# Altium PCB PCB_led.PcbDoc
Units mm, origin at the board's own origin, x right, y up, seen from the top; angles counter-clockwise.
Board outline 30 x 56 mm, 2 copper layers (Top Layer, Bottom Layer); 45 components, 42 nets, 165 pads, 27 vias.
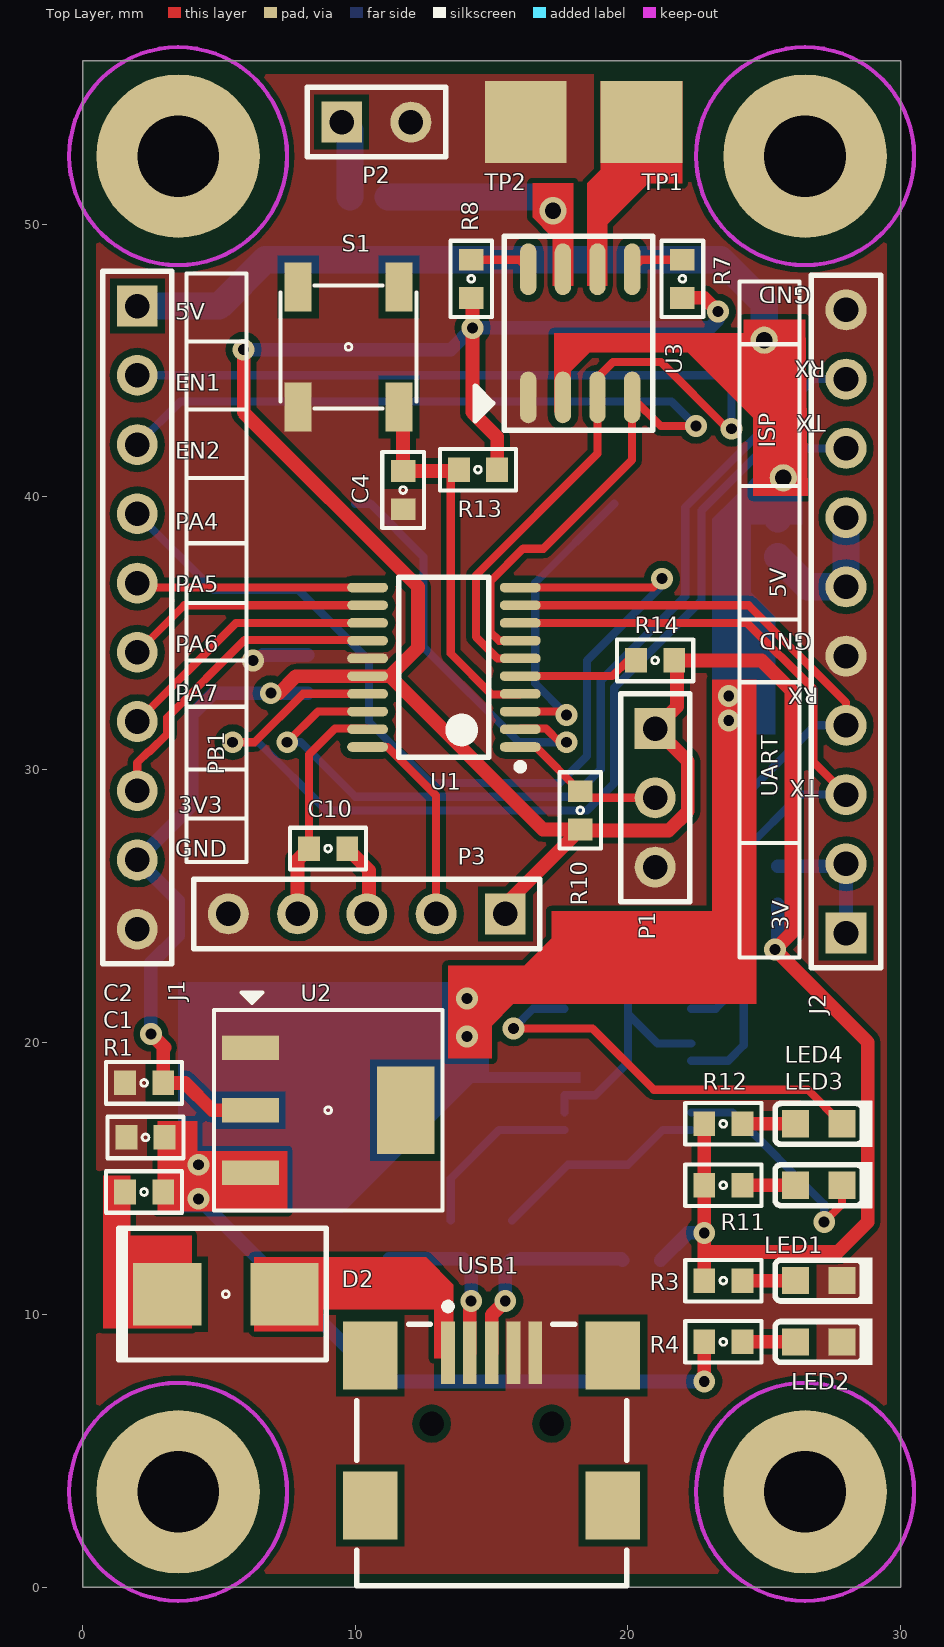
[diagram p0: Top Layer view]
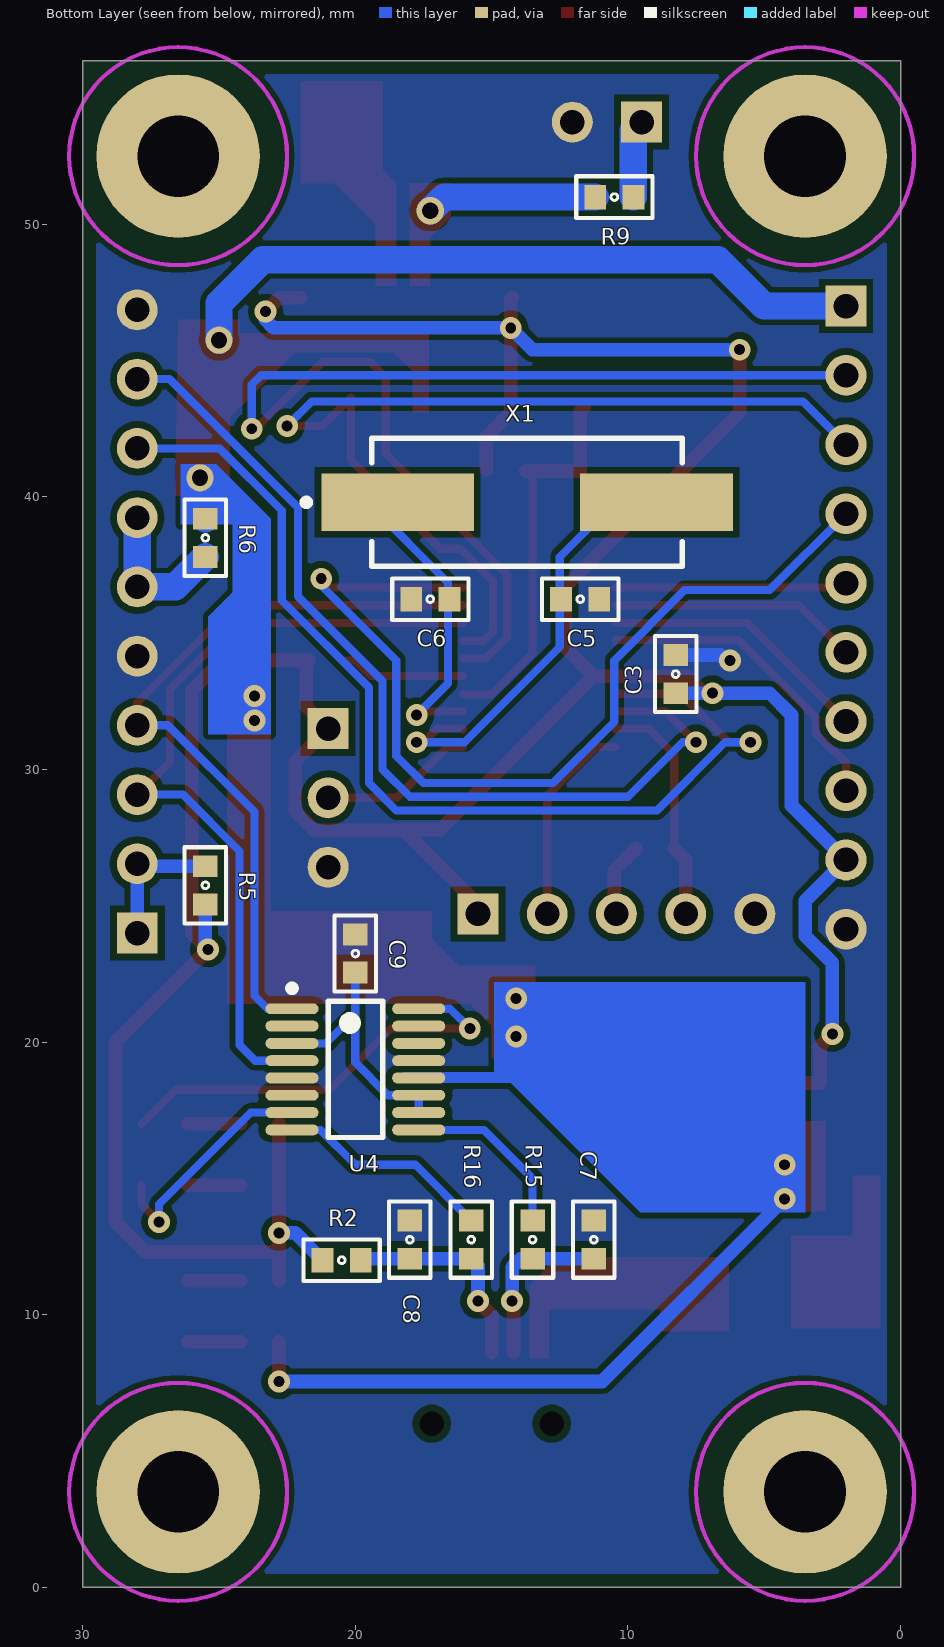
[diagram p1: Bottom Layer view, seen from below]

## Layer stack, top to bottom
Top Solder: solder mask 0.0102, Solder Resist, Dk 3.5
Top Layer: signal copper 0.0356
Dielectric1: dielectric 0.32, FR-4, Dk 4.8
Bottom Layer: signal copper 0.0356
Bottom Solder: solder mask 0.0102, Solder Resist, Dk 3.5

## Board outline
0,0 30,0 30,56 0,56

## Design rules (kind name [scope] priority, off if disabled: settings)
AssemblyTestPointUsage SilkToBoardRegionClearance_2 [All] p2:
AssemblyTestPointUsage SilkToBoardRegionClearance_3 [All] p3:
Clearance [All] p1: gap=0.152
HoleSize [All] p1: absolutevalues=TRUE maxlimit=6.35 minlimit=0.3 maxpercent=80.000 minpercent=20.000
MatchedLengths DiffPair_DIFF100MatchedLengths [InDifferentialPairClass('DIFF100')] p1: tolerance=0.152 checknetsindiffpair=TRUE checkdiffpairvsdiffpair=FALSE checkxsignals=FALSE checkothers=FALSE
MinimumSolderMaskSliver [All] p1: minsoldermaskwidth=0.1
MinimumSolderMaskSliver SilkscreenOverComponentPads_2 [All] p2: minsoldermaskwidth=0.254
MinimumSolderMaskSliver SilkToSolderMaskClearance_1 [IsPad] p3: minsoldermaskwidth=0.254
MinimumSolderMaskSliver SilkscreenOverComponentPads_1 [All] p4: minsoldermaskwidth=0.254
MinimumSolderMaskSliver SilkToSolderMaskClearance [IsPad] p5: minsoldermaskwidth=0.254
MinimumSolderMaskSliver SilkscreenOverComponentPads [All] p6: minsoldermaskwidth=0.254
PolygonConnect [All] p1: connectstyle=Direct reliefconductorwidth=0.254 reliefentries=4 polygonreliefangle="90 Angle" airgapwidth=0.254
RoutingVias [All] p1: holewidth=0.305 width=0.635 viastyle="Through Hole" minholewidth=0.305 minwidth=0.635 maxholewidth=0.711 maxwidth=1.27
SilkToBoardRegionClearance SilkToBoardRegionClearance_1 [All] p2:
SilkToSolderMaskClearance SilkToSolderMaskClearance_2 [IsPad] p1: minsilkscreentomaskgap=0.254 clearancetoexposedcopper=TRUE
SolderMaskExpansion [All] p1: expansion=0.102
Width [All] p1: maxlimit=2.54 minlimit=0.152 preferedwidth=0.254
27 further rules are at their usual default settings.

## Components (designator, comment, footprint, x,y, rotation, side; value= is the part's Value field where it differs from the comment)
C1 "0.1uF" 1608[0603] 2.3,16.5 r0 top
C2 "47uF" 1608[0603] 2.25,18.5 r0 top
C3 "0.1uF" 1608[0603] 8.25,33.5 r270 bottom
C4 "100nf" 1608[0603] 11.75,40.25 r90 top
C5 "20uF" 1608[0603] 11.75,36.25 r180 bottom
C6 "20uF" 1608[0603] 17.25,36.25 r0 bottom
C7 "47pF" 1608[0603] 11.25,12.75 r270 bottom
C8 "47pF" 1608[0603] 18,12.75 r270 bottom
C9 "0.1uF" 1608[0603] 20,23.25 r270 bottom
C10 "1000pF" 1608[0603] 9,27.1 r0 top
D2 "B340LB-13-F" DIOM4336X25N 5.25,10.75 r180 top
J1 "Header 10" HDR1X10 2,47 r270 top
J2 "Header 10" HDR1X10 28,24 r90 top
LED1 "LED2" KING-0603LED_YELLOW_V 27,11.25 r180 top
LED2 "LED2" KING-0603LED_GREEN_V 27,9 r180 top
LED3 "LED2" KING-0603LED_GREEN_V 27,14.75 r180 top
LED4 "LED2" KING-0603LED_ORANGE_V 27,17 r180 top
P1 "Header 3" HDR1X3 21,31.5 r270 top
P2 "Header 2" HDR1X2 9.5,53.75 r0 top
P3 "Header 5" HDR1X5 15.5,24.7 r180 top
R1 "0" 1608[0603] 2.25,14.5 r180 top
R2 "1.5k" 1608[0603] 20.5,12 r180 bottom
R3 "510" 1608[0603] 23.5,11.25 r180 top
R4 "510" 1608[0603] 23.5,9 r180 top
R5 "100" 1608[0603] 25.5,25.75 r90 bottom
R6 "100" 1608[0603] 25.5,38.5 r270 bottom
R7 "22" 1608[0603] 22,48 r90 top
R8 "22" 1608[0603] 14.25,48 r90 top
R9 "1k" 1608[0603] 10.5,51 r180 bottom
R10 "10k" 1608[0603] 18.25,28.5 r270 top
R11 "510" 1608[0603] 23.5,14.75 r180 top
R12 "510" 1608[0603] 23.5,17 r180 top
R13 "10k" 1608[0603] 14.5,41 r180 top
R14 "0" 1608[0603] 21,34 r180 top
R15 "22" 1608[0603] 13.5,12.75 r90 bottom
R16 "22" 1608[0603] 15.75,12.75 r90 bottom
S1 "TSKB-2JL" TSKB-2JL 9.75,45.5 r90 top
TP1 "5V_BATT" PAD1 20.5,53.75 r0 top
TP2 "GND_BATT" PAD1 16.25,53.75 r0 top
U1 "STM32F030F4P6" STM-TSSOP20_L 13.25,33.75 r180 top
U2 "AMS1117-3.3 SOT223" SOT223_L 9,17.5 r0 top
U3 "TI-TPS2066D8" D8_L 18.25,46 r90 top
U4 "FT230XS-U" SSOP-16_L 20,19 r180 bottom
USB1 "USB002" USB/SM0.8-6H5 15,0.75 r270 top
X1 "8MHz" ABRA-ABLS2-2_V 13.7,39.8 r180 bottom

## Footprints (in the part's own frame and the unit in brackets; to place one, negate y for a bottom-side part, rotate by r counter-clockwise, add the part's x,y. Pads: shape width x height; smd on the part's side, far side on the other; paste and mask are expansions set on the pad)
1608[0603] [mm] "Chip Capacitor, Body 1.6x0.8mm, IPC High Density"
  rect 0.8x0.9 smd: 1(-0.7,0) 2(0.7,0)
  silkscreen extent -1.4,-0.76 1.4,0.76, body extent -0.87,-0.48 0.87,0.48, height 1.3
ABRA-ABLS2-2_V [mm] "SMD, 2-Leads, Body 11.4x4.7mm, Height 3.3mm"
  rect 5.6x2.1 smd: 1(-4.75,0) 2(4.75,0)
  silkscreen extent -8.23,-2.35 5.7,2.35, body extent -5.7,-2.35 5.7,2.35, height 3.3
D8_L [mm] "SOIC, 8-Leads, Body 4.9x3.9mm, Pitch 1.27mm, IPC High Density"
  oval 1.9x0.6 smd: 1(-2.35,1.905) 2(-2.35,0.635) 3(-2.35,-0.635) 4(-2.35,-1.905) 5(2.35,-1.905) 6(2.35,-0.635) 7(2.35,0.635) 8(2.35,1.905)
  silkscreen extent -3.56,-2.67 3.56,3.85, body extent -2,-2.5 2,2.5, height 1.75
DIOM4336X25N [mm] "Molded Diode, 2-Leads, Body 4.31x3.62mm, IPC Medium Density"
  rect 2.5x2.3 smd: 1(-2.15,0) 2(2.15,0)
  silkscreen extent -3.68,-2.41 3.94,2.41, body extent -2.5,-1.97 2.5,1.97, height 2.5
HDR1X2 [mm] "Connector; Header; 2 Position"
  rect 1.5x1.5 hole 0.9: 1(0,0)
  round 1.5 hole 0.9: 2(2.54,0)
  silkscreen extent -1.27,-1.27 3.81,1.27
HDR1X3 [mm] "Connector; Header; 3 Position"
  rect 1.5x1.5 hole 0.9: 1(0,0)
  round 1.5 hole 0.9: 2(2.54,0) 3(5.08,0)
  silkscreen extent -1.27,-1.27 6.35,1.27
HDR1X5 [mm] "Connector; Header; 5 Position"
  rect 1.5x1.5 hole 0.9: 1(0,0)
  round 1.5 hole 0.9: 2(2.54,0) 3(5.08,0) 4(7.62,0) 5(10.16,0)
  silkscreen extent -1.27,-1.27 11.43,1.27
HDR1X10 [mm] "Connector; Header; 10 Position"
  rect 1.5x1.5 hole 0.9: 1(0,0)
  round 1.5 hole 0.9: 2(2.54,0) 3(5.08,0) 4(7.62,0) 5(10.16,0) 6(12.7,0) 7(15.24,0) 8(17.78,0) 9(20.32,0) 10(22.86,0)
  silkscreen extent -1.27,-1.27 24.13,1.27
KING-0603LED_GREEN_V [mm] "SMT LED, 2-Leads, Body 1.6x0.8mm (0603-Size)"
  rect 1x1 smd paste+0 mask+0: 1(0.85,0) 2(-0.85,0)
  silkscreen extent -1.97,-0.85 1.6,0.85, body extent -0.92,-0.53 1.09,0.53, height 1.1
KING-0603LED_ORANGE_V [mm] "SMT LED, 2-Leads, Body 1.6x0.8mm (0603-Size)"
  rect 1x1 smd paste+0 mask+0: 1(0.85,0) 2(-0.85,0)
  silkscreen extent -1.97,-0.85 1.6,0.85, body extent -0.92,-0.53 1.09,0.53, height 1.1
KING-0603LED_YELLOW_V [mm] "SMT LED, 2-Leads, Body 1.6x0.8mm (0603-Size)"
  rect 1x1 smd paste+0 mask+0: 1(0.85,0) 2(-0.85,0)
  silkscreen extent -1.97,-0.85 1.6,0.85, body extent -0.92,-0.53 1.09,0.53, height 1.1
PAD1 [mm]
  rect 3x3 smd: 1(0,0)
SOT223_L [mm] "SOT223, 4-Leads, Body 6.5x3.5mm, Pitch 2.3mm, Lead Span 7mm, IPC High Density"
  rect 2.1x0.9 smd: 1(-2.85,2.3) 2(-2.85,0) 3(-2.85,-2.3)
  rect 2.1x3.2 smd: 4(2.85,0)
  silkscreen extent -4.19,-3.68 4.19,4.32, body extent -1.85,-3.35 1.85,3.35, height 1.7
SSOP-16_L [mm] "SOP, 16-Leads, Body 4.9x3.9mm, Pitch 0.635mm, IPC High Density"
  oval 1.95x0.4 smd: 1(-2.325,2.223) 2(-2.325,1.588) 3(-2.325,0.953) 4(-2.325,0.318) 5(-2.325,-0.317) 6(-2.325,-0.952) 7(-2.325,-1.587) 8(-2.325,-2.222) 9(2.325,-2.223) 10(2.325,-1.588) 11(2.325,-0.953) 12(2.325,-0.318) 13(2.325,0.317) 14(2.325,0.952) 15(2.325,1.587) 16(2.325,2.222)
  silkscreen extent -2.45,-2.5 1,3.1, body extent -1.99,-2.5 1.99,2.5, height 1.76
STM-TSSOP20_L [mm] "SOP, 20-Leads, Body 6.6x4.5mm, Pitch 0.65mm, IPC High Density"
  oval 1.5x0.35 smd: 1(-2.8,2.925) 2(-2.8,2.275) 3(-2.8,1.625) 4(-2.8,0.975) 5(-2.8,0.325) 6(-2.8,-0.325) 7(-2.8,-0.975) 8(-2.8,-1.625) 9(-2.8,-2.275) 10(-2.8,-2.925) 11(2.8,-2.925) 12(2.8,-2.275) 13(2.8,-1.625) 14(2.8,-0.975) 15(2.8,-0.325) 16(2.8,0.325) 17(2.8,0.975) 18(2.8,1.625) 19(2.8,2.275) 20(2.8,2.925)
  silkscreen extent -2.93,-3.3 1.65,3.77, body extent -2.25,-3.3 2.25,3.3, height 1.2
TSKB-2JL [mm] "tact switch"
  rect 1.8x1 smd: 1(-2.2,1.85) 2(-2.2,-1.85) 3(2.2,1.85) 4(2.2,-1.85)
  silkscreen extent -2.25,-2.5 2.25,2.5
USB/SM0.8-6H5 [mm] "Connector; USB2.0, Type B, SM; 5 Position; Right Angle"
  rect 2.3x0.5 smd: 1(-7.85,-1.6) 2(-7.85,-0.8) 3(-7.85,0) 4(-7.85,0.8) 5(-7.85,1.6)
  rect 2.5x2 smd: 6(-7.75,4.45) 7(-2.25,4.45) 8(-7.75,-4.45) 9(-2.25,-4.45)
  round 0.6 hole 0.9 unplated: MH1(-5.25,2.2) MH2(-5.25,-2.2)
  silkscreen extent -9.67,-4.95 0.7,4.95, body extent -8.9,-4.95 0.7,4.95, height 3.9

## Part data
C1 C2 C3 C4 C5 C6 C7 C8 C9 C10: library part Cap, "Capacitor"
D2: library part "D Schottky", "Schottky Diode"
J1 J2: "Header, 10-Pin"
LED1 LED2 LED3 LED4: "Typical RED, GREEN, YELLOW, AMBER GaAs LED"
P1: "Header, 3-Pin"
P2: "Header, 2-Pin"
P3: "Header, 5-Pin"
R1 R2 R3 R4 R5 R6 R7 R8 R9 R10 R11 R12 R13 R14 R15 R16: library part Res1, "Resistor"
S1: library part SW-PB, "Switch"
TP1 TP2: library part RAUND1
U1: library part CMP-0304-00039-2, "ARM Cortex-M0 32-bit MCU, 16 KB Flash, 4 KB Internal RAM, 15 I/Os, 20-pin TSSOP, -40 to 85 degC, Tube"
U2: library part AMS1117-3.3
U4: library part CMP-0248-00025-2, "USB to Basic UART Interface Chip, UHCI/OHCI/EHCI Compatible, USB 2.0 Compatible, -40 to +85 degC, 16-Pin SSOP, Pb-Free, Tube"
X1: library part CMP-0277-00002-1, "Low Profile Surface Mount Microprocessor Crystal, 4.096 MHz +/-30 ppm, 180 Ohm, -40 to 85 degC, 2-Pin 11.4 x 4.7 x 3.3 mm SMD, RoHS, Tape and Reel"

## Free pads (board coordinates)
  round 6 hole 3: ""(3.5,3.5) ""(3.5,52.5) ""(26.5,3.5) ""(26.5,52.5)
  round 1 hole 0.6: ""(25,45.75) ""(25.7,40.7)

## Via types
v1: diameter 0.8, hole 0.4, Top Layer to Bottom Layer, 26 vias
v2: diameter 1, hole 0.6, Top Layer to Bottom Layer, 1 vias

## Nets (pads, with @x,y where several pads share a name; then routed paths per layer and width w, separated by ;. In a path a pad name is that pad's centre, name@x,y a point inside that pad or via, vN(x,y) a via of type N, cw(c..) or ccw(c..) an arc to the next point about the centre after c; other vN are vias at no path point)
3V3: C2.2 C3.2 J1.9 P1.1 P3.1 R2.1 R3.2 R5.1 R7.1 R8.1 R10.2 R11.2 R12.2 R13.1 R14.1 U1.16 U2.2 | length 136.9
  Top Layer w0.5: v1(2.5,20.3) 3,19.8 2.95,19.75 C2.2 3.75,18.5 4.75,17.5 U2.2 ; v1(5.9,45.4) 5.9,43.1 12.3,36.7 12.3,34.466 11.259,33.425 ; v1(6.9,32.8) 7.2,32.8 7.825,33.425 U1.16 11.259,33.425 ; R8.1 14.3,47.25 v1(14.3,46.2) 14.3,43.1 15.2,42.2 R13.1 ; P3.1 15.5,25.05 R10.2 ; R7.1 22.8,47.3 v1(23.3,46.8) ; R12.2 v1(22.8,13) R3.2 22.8,12.3 27.7,12.3 28.8,13.4 28.8,20 v1(25.4,23.4) 26,24 26,32.9 24.9,34 R14.1 21.8,33.9 21.8,32.3 P1.1 22.2,30.3 22.2,28.463 21.497,27.76 18.25,27.76 R10.2 ; 11.259,33.425 16.884,27.8 R10.2
  Bottom Layer w0.5: v1(2.5,20.3) 2.5,22.9 3.5,23.9 3.5,25.18 J1.9 4,28.68 4,32 4.8,32.8 C3.2 ; v1(5.9,45.4) 13.5,45.4 v1(14.3,46.2) 23,46.2 23.3,46.5 v1(23.3,46.8) ; R2.1 22.2,13 v1(22.8,13) ; v1(25.4,23.4) 25.5,23.5 R5.1
5V: C1.2 J1.1 pad.@25,45.75 pad.@25.7,40.7 R1.1 R4.2 R6.1 U2.3 U3.2 U4.12 | length 50.1
  Top Layer w0.5: v1(22.8,7.55) R4.2
  Bottom Layer w0.5: v1(4.25,14.25) 10.95,7.55 v1(22.8,7.55)
  Bottom Layer w1: J1.1 5,47 6.7,48.7 23.4,48.7 25,47.1 pad.@25,45.75 ; R6.1 25.5,40.5 pad.@25.7,40.7
  other v1: 4.25,15.5 14.1,20.2 14.1,21.6 23.7,31.8 23.7,32.7
5V_BATT: TP1.1 U3.6
BOOT: P1.2 R10.1 U1.1 | length 5.7
  Top Layer w0.3: U1.1 16.625,30.825 R10.1 18.49,28.96 P1.2
EN1: J1.2 U1.6 U3.3 | length 43
  Top Layer w0.3: U1.6 15.218,34.075 14.425,34.868 14.425,37.125 18.885,41.585 U3.3 18.885,44.385 19.45,44.95 21.211,44.95 23.661,42.5 v1(23.8,42.5)
  Bottom Layer w0.3: J1.2 23.46,44.46 23.8,44.12 v1(23.8,42.5)
EN2: J1.3 U1.7 U3.4 | length 36.7
  Top Layer w0.3: U1.7 15.275,34.725 14.95,35.05 14.95,36.892 16.158,38.1 16.9,38.1 20.155,41.355 U3.4 21.205,42.6 v1(22.5,42.6)
  Bottom Layer w0.3: J1.3 3.58,43.5 21.6,43.5 v1(22.5,42.6)
GND: C1.1 C2.1 C3.1 C4.1 C5.2 C6.2 C7.1 C8.1 C9.1 J1.10 J2.5 J2.10 LED1.2 LED2.2 P1.3 P2.2 P3.5 S1.1 TP2.1 U1.15 U2.1 U3.1 U4.5 U4.13 USB1.4 USB1.5 | length 2.1
  Bottom Layer w0.5: v1(6.25,34) 6.4,34 6.6,34.2 C3.1
LED_PWR: R9.1 U3.7 | length 8.6
  Top Layer w0.5: v2(17.25,50.5) 17.615,50.135 U3.7
  Bottom Layer w1: R9.1 16.75,51 v2(17.25,50.5)
NetC4_2: C4.2 R13.2 S1.2 U1.4 | length 14.5
  Top Layer w0.3: R13.2 13.5,40.7 13.5,34.25 15,32.75 16.025,32.75 U1.4
  Top Layer w0.5: S1.2 11.75,43.15 C4.2 R13.2@13.75,40.95
NetC5_1: C5.1 U1.2 X1.2 | length 15.2
  Top Layer w0.3: U1.2 16.075,31.5 17,31.5 17.5,31 v1(17.75,31)
  Bottom Layer w0.3: X1.2@10,39.75 10.55,39.75 12.5,37.8 12.5,34.5 16,31 v1(17.75,31)
NetC6_1: C6.1 U1.3 X1.1 | length 11.2
  Top Layer w0.3: U1.3 17.625,32.125 v1(17.75,32)
  Bottom Layer w0.3: v1(17.75,32) 16.6,33.15 16.6,36.85 X1.1@19.5,39.75
NetC9_2: C9.2 U4.3 U4.10 U4.11 | length 9.5
  Bottom Layer w0.3: U4.10 U4.11 18.798,18.048 20,19.25 20,21.038 ; C9.2 20,21.038 ; U4.3 21.085,19.953 20,21.038
NetC10_2: C10.2 P3.3 | length 2.7
  Top Layer w0.5: C10.2 10.5,26.3 P3.3@10.5,24.7
NetD2_1: D2.1 USB1.1
NetD2_2: D2.2 R1.2
NetJ2_1: J2.1 J2.2 R5.2 | length 5.1
  Bottom Layer w0.5: R5.2 27.91,26.45 J2.2 J2.1
NetJ2_6: J2.6 J2.7 R6.2 | length 5.5
  Bottom Layer w1: R6.2 26.6,36.7 J2.6 J2.7
NetLED1_1: LED1.1 R3.1 | length 2
  Top Layer w0.5: R3.1 LED1.1
NetLED2_1: LED2.1 R4.1 | length 2
  Top Layer w0.5: R4.1 LED2.1
NetLED3_1: LED3.1 R11.1 | length 1.9
  Top Layer w0.5: R11.1 LED3.1
NetLED3_2: LED3.2 U4.7 | length 8.5
  Top Layer w0.3: v1(27.2,13.4) 27.85,14.05 LED3.2
  Bottom Layer w0.3: U4.7 23.837,17.413 27.2,14.05 v1(27.2,13.4)
NetLED4_1: LED4.1 R12.1 | length 1.9
  Top Layer w0.5: R12.1 LED4.1
NetLED4_2: LED4.2 U4.16 | length 15.7
  Top Layer w0.3: v1(15.8,20.5) 18.7,20.5 20.95,18.25 26.6,18.25 LED4.2
  Bottom Layer w0.3: v1(15.8,20.5) 16.523,21.223 U4.16
NetP2_1: P2.1 R9.2 | length 2.9
  Bottom Layer w1: P2.1 9.8,53.45 R9.2
NetR7_2: R7.2 U3.5 | length 2
  Top Layer w0.3: U3.5 20.505,48.7 R7.2
NetR8_2: R8.2 U3.8 | length 2.2
  Top Layer w0.3: R8.2 15.995,48.7 U3.8
NetR14_2: R14.2 U1.5 | length 4.5
  Top Layer w0.3: U1.5 19.425,33.425 20,34 R14.2
NetR15_2: R15.2 U4.9 | length 6.5
  Bottom Layer w0.3: R15.2 13.5,15 15.278,16.778 U4.9
NetR16_2: R16.2 U4.8 | length 8
  Bottom Layer w0.3: R16.2 17.8,15.5 20,15.5 21.278,16.778 U4.8
PA4: J1.4 U1.10 | length 35.3
  Top Layer w0.3: U1.10 20.925,36.675 v1(21.25,37)
  Bottom Layer w0.3: J1.4 4.8,36.58 7.92,36.58 10.5,34 10.5,31.75 12.75,29.5 17.5,29.5 18.5,30.5 18.5,34 21.25,36.75 v1(21.25,37)
PA5: J1.5 U1.11 | length 8.5
  Top Layer w0.3: J1.5 2.165,36.675 U1.11
PA6: J1.6 U1.12 | length 9.2
  Top Layer w0.3: J1.6 3.725,36.025 U1.12
PA7: J1.7 U1.13 | length 9.9
  Top Layer w0.3: J1.7 5.615,35.375 U1.13
PB1: J1.8 U1.14 | length 11.7
  Top Layer w0.3: J1.8 2,30.25 2.41,30.66 2.456,30.66 3.1,31.304 3.1,31.911 5.939,34.75 10.425,34.75 U1.14
RX: J2.9 U1.18 | length 34.9
  Top Layer w0.3: v1(7.5,31) 8.625,32.125 U1.18
  Bottom Layer w0.3: v1(7.5,31) 8,31 10,29 18,29 19,30 19,33.25 22.1,36.35 22.1,39.607 26.813,44.32 J2.9
SWCLK: P3.2 U1.20 | length 7.6
  Top Layer w0.3: U1.20 11.175,30.825 12.96,29.04 P3.2
SWDAT: C10.1 P3.4 U1.19 | length 8.6
  Top Layer w0.3: C10.1 8.3,30.55 9.25,31.5 10.425,31.5 U1.19
  Top Layer w0.5: P3.4 7.88,26.68 C10.1
TX: J2.8 U1.17 | length 38.7
  Top Layer w0.3: v1(5.5,31) 6.3,31 8.075,32.775 U1.17
  Bottom Layer w0.3: v1(5.5,31) 6.439,31 8.939,28.5 18.5,28.5 19.5,29.5 19.5,33 22.7,36.2 22.7,39.5 24.98,41.78 J2.8
UART_RX: J2.4 U1.9 U4.1 | length 28.2
  Top Layer w0.3: U1.9 24.431,36.025 28,32.456 J2.4
  Bottom Layer w0.3: U4.1 23.222,21.223 23.7,21.7 23.7,28.45 26.87,31.62 J2.4
UART_TX: J2.3 U1.8 U4.4 | length 30
  Top Layer w0.3: U1.8 24.374,35.375 26.8,32.949 26.8,30.28 J2.3
  Bottom Layer w0.3: U4.4 23.683,19.318 24.25,19.885 24.25,27 26.33,29.08 J2.3
USB_D_N: C7.2 R15.1 USB1.2 | length 6.3
  Top Layer w0.5: USB1.2 14.2,10.45 v1(14.25,10.5)
  Bottom Layer w0.5: C7.2 R15.1 13.95,12.05 14.25,11.75 v1(14.25,10.5)
USB_D_P: C8.2 R2.2 R16.1 USB1.3 | length 7.8
  Top Layer w0.5: USB1.3 15,9.986 15.5,10.486 v1(15.5,10.5)
  Bottom Layer w0.5: v1(15.5,10.5) 15.5,11.8 R16.1 19.75,12.05 R2.2
pads on no net: S1.3 S1.4 U2.4 U4.2 U4.6 U4.14 U4.15 USB1.6 USB1.7 USB1.8 USB1.9 USB1.MH1 USB1.MH2

## Polygon pours and split planes (outlines as drawn)
GND on Top Layer "GND_L01_P002" (solid, remove dead copper, pour order 2): 0.5,55.5 0.5,0.5 29.5,0.5 29.5,55.5
GND on Bottom Layer "GND_L02_P004" (solid, remove dead copper, pour order 4): 0.5,55.5 29.5,55.5 29.5,0.5 0.5,0.5

## Keep-outs
Keep-Out Layer:
  circle w0.15: c3.5,3.5 r4
  circle w0.15: c3.5,52.5 r4
  circle w0.15: c26.5,52.5 r4
  circle w0.15: c26.5,3.5 r4

## Other copper
Top Layer:
  region net 5V_BATT: 18.5,47.75 19.25,47.75 19.25,50 20.75,51.5 22,51.5 22,55.25 19,55.25 19,52 18.5,51.5
  region net LED_PWR: 18,47.75 17.25,47.75 17.25,49.5 16.5,50.25 16.5,50.5 16.5,51.5 18,51.5
  region net NetD2_1: 13.6,8.4 13.6,11.1 12.6,12.1 6.3,12.1 6.3,9.4 8.8,9.4 8.8,10.2 12.9,10.2 12.9,8.4
  region net NetD2_2: 4,9.5 4,12.9 1.75,12.9 1.75,15.1 0.75,15.1 0.75,9.5
  region net 5V: 2.75,13.8 7.5,13.8 7.5,16 4.2,16 4.2,17.1 2.75,17.1
  region net 5V: 17.3,43.1 17.9,43.1 17.9,44.6 18.6,45.3 22.2,45.3 24.6,42.9 24.6,40.05 26.6,40.05 26.5,46.5 24.25,46.5 24.25,46 17.3,46
  region net 5V: 13.4,22.8 13.4,19.4 15,19.4 15,20.6 15.8,21.4 24.7,21.4 24.7,30.3 24.7,33.3 23.1,33.3 23.1,24.8 17.2,24.8 17.2,23.8 16.2,22.8
Bottom Layer:
  region net 5V: 3.5,13.75 9.55,13.75 14.3,18.5 18.25,18.5 18.25,18.9 14.9,18.9 14.9,22.2 3.5,22.2
  region net 5V: 25.4,31.3 23.1,31.3 23.1,39.2 23.8,39.9 25.1,41.2 26.4,41.2 26.4,39 24.5,39 24.5,36.5 25.4,35.6

## Silkscreen, mask and mechanical layers (free items; w line width, h text height)
Top Overlay:
  lines w0.15: 3.8,28.2 6,28.2 ; 3.8,30 6,30 ; 3.8,32.3 6,32.3 ; 3.8,34 6,34 ; 3.8,36.1 6,36.1 ; 3.8,38.3 6,38.3 ; 3.8,43.2 5.9,43.2 ; 3.8,45.7 6,45.7 ; 3.9,40.7 6,40.7 ; 24.1,27.3 26.3,27.3 ; 24.1,40.4 26.3,40.4 ; 24.1,45.6 26.3,45.6 ; 24.2,33.2 26.3,33.2 ; 24.2,35.5 26.3,35.5 ; 3.8,26.6 6,26.6 6,27 6,48.2 3.8,48.2 3.8,26.6 ; 24.1,23.1 24.1,47.9 26.3,47.9 26.3,23.1 24.1,23.1
  text "GND" at 26.7,47.7 h0.6 r180
  text "5V" at 3.4,46.5 h0.6
  text "RX" at 27.25,45 h0.6 r180
  text "EN1" at 3.4,43.9 h0.6
  text "TX" at 27.25,43 h0.6 r180
  text "ISP" at 25.4,41.8 h0.6 r90
  text "EN2" at 3.4,41.4 h0.6
  text "PA4" at 3.4,38.8 h0.6
  text "PA5" at 3.4,36.5 h0.6
  text "5V" at 25.8,36.3 h0.6 r90
  text "GND" at 26.73,35 h0.6 r180
  text "PA6" at 3.4,34.3 h0.6
  text "RX" at 27,33 h0.6 r180
  text "PA7" at 3.4,32.5 h0.6
  text "PB1" at 5.2,29.8 h0.6 r90
  text "TX" at 27,29.6 h0.6 r180
  text "UART" at 25.5,29 h0.6 r90
  text "3V3" at 3.5,28.4 h0.6
  text "GND" at 3.4,26.8 h0.6
  text "3V" at 25.9,24.1 h0.6 r90
Mechanical 1:
  the board outline again, w0.15
Mechanical 16:
  drawing of 1874 lines, arcs and shapes, not listed
  text "1" at -29.286,135.509 h1.78
  text "2" at 43.358,135.509 h1.78
  text "3" at 116.51,135.509 h1.78
  text "4" at 189.408,135.509 h1.78
  text "A" at -63.627,112.497 h1.78
  text "A" at 223.393,112.497 h1.78
  text "B" at -63.627,64.44 h1.78
  text "B" at 223.393,64.44 h1.78
  text "C" at -63.627,15.926 h1.78
  text "C" at 225.755,-0.642 h1.78
  text "ENGINEER:" at 108.458,-21.082 h1.14
  text "TITLE:" at 146.558,-21.082 h1.14
  text "PCB DESIGNER:" at 108.458,-28.575 h1.14
  text "D" at -63.627,-32.08 h1.78
  text "D" at 223.393,-32.08 h1.78
  text "DATE:" at 108.458,-36.322 h1.14
  text "PART NO.:" at 146.558,-36.322 h1.14
  text "REV:" at 199.898,-36.322 h1.14
  text "Altium Limited" at 75.438,-38.862 h1.78
  text ".PRINT_DATE" at 109.728,-39.37 h1.78
  text "12a Rodborough Rd" at 75.438,-41.402 h1.78
  text "Frenchs Forest" at 75.438,-43.942 h1.78
  text "FILE NAME:" at 108.458,-43.942 h1.14
  text "DWG NO:" at 146.558,-43.942 h1.14
  text "SCALE:" at 199.898,-43.942 h1.14
  text "NSW 2086" at 75.438,-46.482 h1.78
  text ".PCB_FILE_NAME_NO_PATH" at 109.728,-46.99 h1.78
  text "1" at -29.286,-52.451 h1.78
  text "2" at 43.358,-52.451 h1.78
  text "3" at 116.51,-52.451 h1.78
  text "4" at 189.408,-52.451 h1.78
Drill Drawing:
  drawing of 291 lines, arcs and shapes, not listed
  text "Symbol" at -52.768,128.397 h1.83
  text "Count" at -39.919,128.397 h1.83
  text "Hole Size" at -26.207,128.397 h1.83
  text "Plated" at 2.233,128.397 h1.83
  text "Hole Type" at 15.082,128.397 h1.83
  text "Drill Layer Pair" at 33.721,128.397 h1.83
  text "Via/Pad" at 71.809,128.397 h1.83
  text "Pad Shape" at 86.791,128.397 h1.83
  text "Template" at 105.735,128.397 h1.83
  text "Description" at 122.24,128.397 h1.83
  text "Hole Tolerance (+)" at 143.926,128.397 h1.83
  text "Hole Tolerance (-)" at 177.8,128.397 h1.83
  text "2" at -39.919,124.587 h1.52
  text "0.900mm (35.43mil)" at -26.207,124.587 h1.52
  text "NPTH" at 2.233,124.587 h1.52
  text "Round" at 15.082,124.587 h1.52
  text "Top Layer - Bottom Layer" at 33.721,124.587 h1.52
  text "Pad" at 71.809,124.587 h1.52
  text "Rounded" at 86.791,124.587 h1.52
  text "c60hn90" at 105.735,124.587 h1.52
  text "3" at -39.919,120.777 h1.52
  text "0.600mm (23.62mil)" at -26.207,120.777 h1.52
  text "PTH" at 2.233,120.777 h1.52
  text "Round" at 15.082,120.777 h1.52
  text "Top Layer - Bottom Layer" at 33.721,120.777 h1.52
  text "(Mixed)" at 71.809,120.777 h1.52
  text "Rounded" at 86.791,120.777 h1.52
  text "(Mixed)" at 105.735,120.777 h1.52
  text "4" at -39.919,116.967 h1.52
  text "3.000mm (118.11mil)" at -26.207,116.967 h1.52
  text "PTH" at 2.233,116.967 h1.52
  text "Round" at 15.082,116.967 h1.52
  text "Top Layer - Bottom Layer" at 33.721,116.967 h1.52
  text "Pad" at 71.809,116.967 h1.52
  text "Rounded" at 86.791,116.967 h1.52
  text "c600h300" at 105.735,116.967 h1.52
  text "26" at -39.919,113.157 h1.52
  text "0.400mm (15.75mil)" at -26.207,113.157 h1.52
  text "PTH" at 2.233,113.157 h1.52
  text "Round" at 15.082,113.157 h1.52
  text "Top Layer - Bottom Layer" at 33.721,113.157 h1.52
  text "Via" at 71.809,113.157 h1.52
  text "Rounded" at 86.791,113.157 h1.52
  text "v80h40" at 105.735,113.157 h1.52
  text "30" at -39.919,109.347 h1.52
  text "0.900mm (35.43mil)" at -26.207,109.347 h1.52
  text "PTH" at 2.233,109.347 h1.52
  text "Round" at 15.082,109.347 h1.52
  text "Top Layer - Bottom Layer" at 33.721,109.347 h1.52
  text "Pad" at 71.809,109.347 h1.52
  text "(Mixed)" at 86.791,109.347 h1.52
  text "(Mixed)" at 105.735,109.347 h1.52
  text "65 Total" at -39.919,105.537 h1.52
  text "Layer" at 100.618,100.903 h1.52
  text "Name" at 111.03,100.903 h1.52
  text "Material" at 134.646,100.903 h1.52
  text "Thickness" at 156.484,100.903 h1.52
  text "Constant" at 172.99,100.903 h1.52
  text "Board Layer Stack" at 187.464,100.903 h1.52
  text "1" at 100.618,97.855 h1.52
  text "Top Overlay" at 111.03,97.855 h1.52
  text "2" at 100.618,94.807 h1.52
  text "Top Solder" at 111.03,94.807 h1.52
  text "Solder Resist" at 134.646,94.807 h1.52
  text "0.010mm" at 156.484,94.807 h1.52
  text "3.5" at 172.99,94.807 h1.52
  text "3" at 100.618,91.759 h1.52
  text "Top Layer" at 111.03,91.759 h1.52
  text "Copper" at 134.646,91.759 h1.52
  text "0.036mm" at 156.484,91.759 h1.52
  text "4" at 100.618,88.711 h1.52
  text "Dielectric1" at 111.03,88.711 h1.52
  text "FR-4" at 134.646,88.711 h1.52
  text "0.320mm" at 156.484,88.711 h1.52
  text "4.8" at 172.99,88.711 h1.52
  text "5" at 100.618,85.663 h1.52
  text "Bottom Layer" at 111.03,85.663 h1.52
  text "Copper" at 134.646,85.663 h1.52
  text "0.036mm" at 156.484,85.663 h1.52
  text "6" at 100.618,82.615 h1.52
  text "Bottom Solder" at 111.03,82.615 h1.52
  text "Solder Resist" at 134.646,82.615 h1.52
  text "0.010mm" at 156.484,82.615 h1.52
  text "3.5" at 172.99,82.615 h1.52
  text "7" at 100.618,79.567 h1.52
  text "Bottom Overlay" at 111.03,79.567 h1.52

## Dimensions
0,56 to 30,56 on Mechanical 5
0,56 to 0,0 on Mechanical 5

## Text inside footprints (layer, text, board x,y; h text height)
USB1: Mechanical 1 "PCB Edge" at 10.964,0.318 h0.25